# Altium PCB Door locking System PCB.PcbDoc
Units mm, origin at the board's own origin, x right, y up, seen from the top; angles counter-clockwise.
Board outline 152.4 x 101.6 mm, 2 copper layers (Top Layer, Bottom Layer); 23 components, 35 nets, 105 pads, 0 vias.
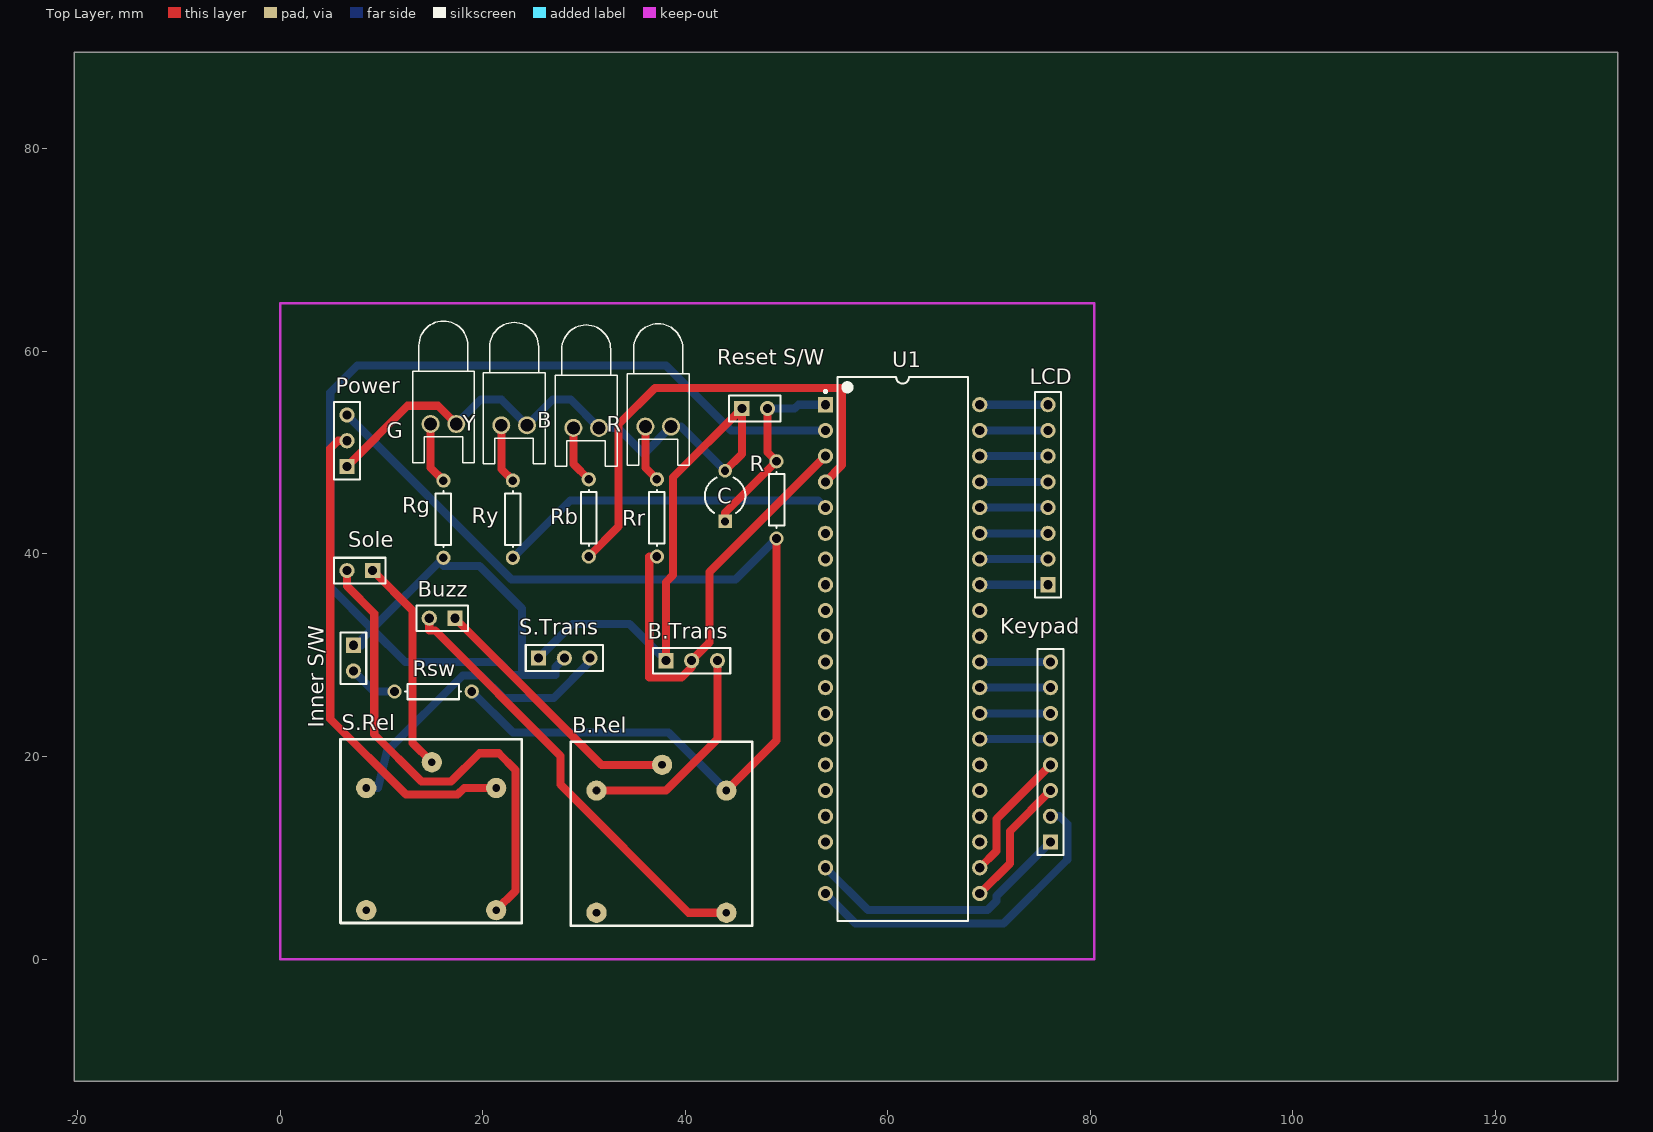
[diagram p0: Top Layer view]
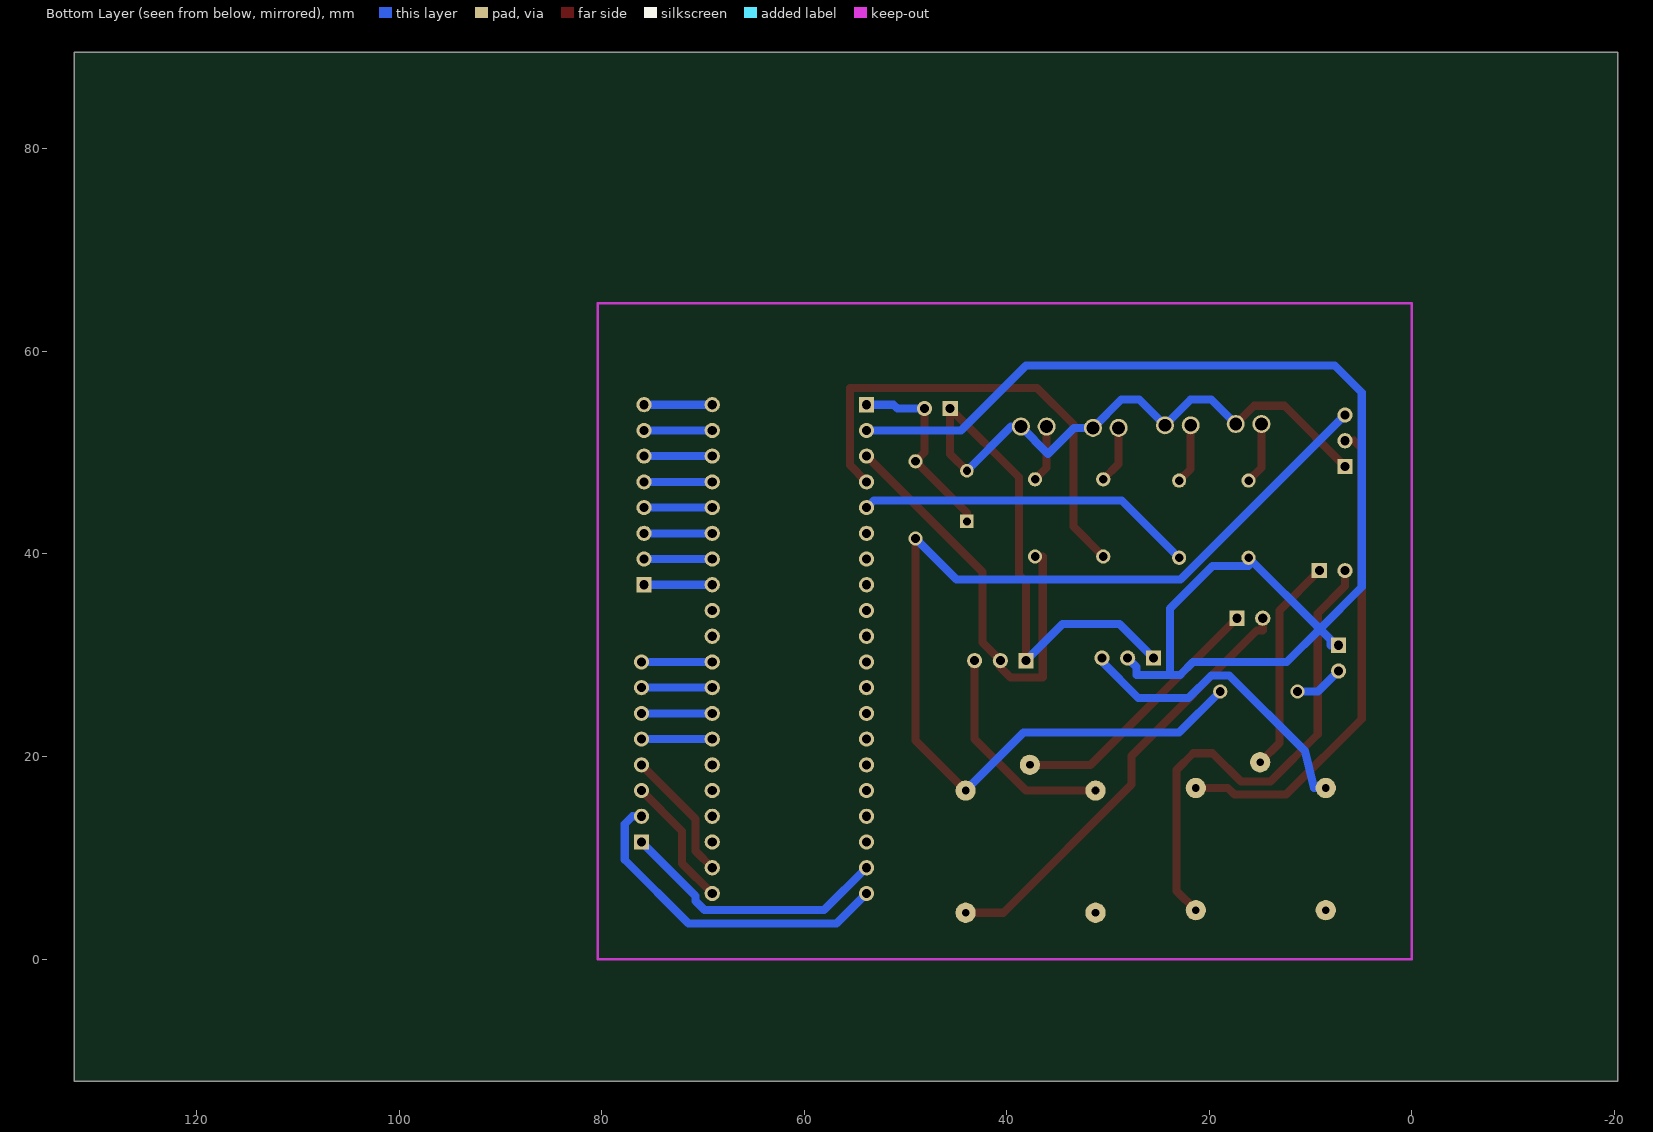
[diagram p1: Bottom Layer view, seen from below]

## Layer stack, top to bottom
Top Layer: signal copper 0.0356
Dielectric: dielectric 0.32, FR-4, Dk 4.8
Bottom Layer: signal copper 0.0356

## Board outline
-20.32,-12.065 132.08,-12.065 132.08,89.535 -20.32,89.535

## Design rules (kind name [scope] priority, off if disabled: settings)
Clearance [All] p1: gap=0.5
PolygonConnect [All] p1: connectstyle=Relief reliefconductorwidth=0.254 reliefentries=4 polygonreliefangle="90 Angle"
RoutingTopology [All] p1: topology=Daisy_Simple
RoutingVias [All] p1: holewidth=0.711 width=1.27 viastyle="Through Hole" minholewidth=0.711 minwidth=1.27 maxholewidth=0.711 maxwidth=1.27
SilkscreenOverComponentPads [All] p1: minsilkscreentomaskgap=0.254
SolderMaskExpansion [All] p1: expansion=0.102
Width [All] p1: maxlimit=0.8 minlimit=0.8 preferedwidth=0.8
26 further rules are at their usual default settings.

## Components (designator, comment, footprint, x,y, rotation, side; value= is the part's Value field where it differs from the comment)
B "Blue" LED-0 30.226,52.451 r180 top
B.Rel "Header 5" relay 37.846,10.922 r0 top
B.Trans "2N3904" HDR1X3 38.1,29.464 r0 top
Buzz "Header 2" HDR1X2 17.272,33.655 r180 top
C "Cap2" CAPR5-4X5 43.942,45.72 r90 top
G "Green" LED-0 16.129,52.832 r180 top
"Inner S/W" "Header 2" HDR1X2 7.239,30.988 r270 top
Keypad "Header 8" HDR1X8 76.073,11.557 r90 top
LCD "Header 8" HDR1X8 75.819,36.957 r90 top
Power "Header 3" HDR1X3 6.604,48.641 r90 top
R "Red" LED-0 37.338,52.578 r180 top
R "Res1" AXIAL-0.3 49.022,45.339 r270 top
Rb "Res1" AXIAL-0.3 30.48,43.561 r270 top
"Reset S/W" "Header 2" HDR1X2 45.593,54.356 r0 top
Rg "Res1" AXIAL-0.3 16.129,43.434 r270 top
Rr "Res1" AXIAL-0.3 37.211,43.561 r270 top
Rsw "Res1" AXIAL-0.3 15.113,26.416 r0 top
Ry "Res1" AXIAL-0.3 22.987,43.434 r270 top
S.Rel "Header 5" relay 15.113,11.176 r0 top
S.Trans "2N3904" HDR1X3 25.527,29.718 r0 top
Sole "Header 2" HDR1X2 9.144,38.354 r180 top
U1 "PIC18F4520-I/P" PDIP600-P40 61.468,30.607 r0 top
Y "Yellow" LED-0 23.114,52.705 r180 top

## Footprints (in the part's own frame and the unit in brackets; to place one, negate y for a bottom-side part, rotate by r counter-clockwise, add the part's x,y. Pads: shape width x height; smd on the part's side, far side on the other; paste and mask are expansions set on the pad)
AXIAL-0.3 [mm] "Axial Device, Thru-Hole; 2 Leads; 0.3 in Pin Spacing"
  round 1.4 hole 0.85: 1(-3.81,0) 2(3.81,0)
  silkscreen extent -2.77,-0.76 2.77,0.76
CAPR5-4X5 [mm] "Capacitor; 2 Leads"
  rect 1.35x1.35 hole 0.8: 1(-2.5,0)
  round 1.35 hole 0.8: 2(2.5,0)
  silkscreen extent -1.69,-2 1.82,2
HDR1X2 [mm] "Connector; Header; 2 Position"
  rect 1.5x1.5 hole 0.9: 1(0,0)
  round 1.5 hole 0.9: 2(2.54,0)
  silkscreen extent -1.27,-1.27 3.81,1.27
HDR1X3 [mm] "Connector; Header; 3 Position"
  rect 1.5x1.5 hole 0.9: 1(0,0)
  round 1.5 hole 0.9: 2(2.54,0) 3(5.08,0)
  silkscreen extent -1.27,-1.27 6.35,1.27
HDR1X8 [mm] "Connector; Header; 8 Position"
  rect 1.5x1.5 hole 0.9: 1(0,0)
  round 1.5 hole 0.9: 2(2.54,0) 3(5.08,0) 4(7.62,0) 5(10.16,0) 6(12.7,0) 7(15.24,0) 8(17.78,0)
  silkscreen extent -1.27,-1.27 19.05,1.27
LED-0 [mil] "LED; 2 Leads"
  round 70 hole 50: 1(50,0) 2(-50,0)
  silkscreen extent -120,-400 120,150
PDIP600-P40 [mm] "DIP, 40-Leads, Row Spacing 15.24mm, Pitch 2.54mm, Body 51.8x13.5mm"
  rect 1.5x1.5 hole 0.9: 1(-7.62,24.13)
  round 1.5 hole 0.9: 2(-7.62,21.59) 3(-7.62,19.05) 4(-7.62,16.51) 5(-7.62,13.97) 6(-7.62,11.43) 7(-7.62,8.89) 8(-7.62,6.35) 9(-7.62,3.81) 10(-7.62,1.27) 11(-7.62,-1.27) 12(-7.62,-3.81) 13(-7.62,-6.35) 14(-7.62,-8.89) 15(-7.62,-11.43) 16(-7.62,-13.97) 17(-7.62,-16.51) 18(-7.62,-19.05) 19(-7.62,-21.59) 20(-7.62,-24.13) 21(7.62,-24.13) 22(7.62,-21.59) 23(7.62,-19.05) 24(7.62,-16.51) 25(7.62,-13.97) 26(7.62,-11.43) 27(7.62,-8.89) 28(7.62,-6.35) 29(7.62,-3.81) 30(7.62,-1.27) 31(7.62,1.27) 32(7.62,3.81) 33(7.62,6.35) 34(7.62,8.89) 35(7.62,11.43) 36(7.62,13.97) 37(7.62,16.51) 38(7.62,19.05) 39(7.62,21.59) 40(7.62,24.13)
  silkscreen extent -7.74,-26.85 6.45,26.85, body extent -7.3,-26.85 7.3,26.85, height 6.35
relay [mm]
  round 2 hole 0.762: 1(-6.604,5.715) 2(6.223,5.715) 3(-6.604,-6.35) 4(6.223,-6.35) 5(-0.127,8.255)
  silkscreen extent -9.14,-7.62 8.76,10.54

## Part data
B: library part LED3, "Typical BLUE SiC LED"
B.Rel S.Rel: "Header, 5-Pin"
B.Trans S.Trans: "NPN General Purpose Amplifier"
Buzz "Inner S/W" "Reset S/W" Sole: "Header, 2-Pin"
C: "Capacitor"
G R Y: library part LED2, "Typical RED, GREEN, YELLOW, AMBER GaAs LED"
Keypad LCD: "Header, 8-Pin"
Power: "Header, 3-Pin"
R Rb Rg Rr Rsw Ry: "Resistor"
U1: "Enhanced Flash Microcontroller with 10-Bit A/D and nanoWatt Technology, 32K Flash, 40-Pin PDIP, Industrial Temperature Range"

## Nets (pads, with @x,y where several pads share a name; then routed paths per layer and width w, separated by ;. In a path a pad name is that pad's centre, name@x,y a point inside that pad or via, vN(x,y) a via of type N, cw(c..) or ccw(c..) an arc to the next point about the centre after c; other vN are vias at no path point)
GND: "Reset S/W.1" B.2 B.Trans.1 C.2 G.2 Power.1 R.2@38.608,52.578 S.Trans.1 Y.2 | length 99.1
  Top Layer w0.8: Power.1 12.598,54.635 15.596,54.635 G.2 ; B.Trans.1 38.1,37.211 38.811,37.922 38.811,47.574 45.593,54.356 45.593,49.871 C.2
  Bottom Layer w0.8: G.2 19.812,55.245 21.844,55.245 Y.2 26.924,55.245 28.702,55.245 B.2 33.35,52.451 35.916,49.886 38.608,52.578 39.584,52.578 C.2 ; S.Trans.1 28.88,33.071 34.493,33.071 B.Trans.1
NetB.Rel_1: B.Rel.1 B.Trans.3 | length 21.8
  Top Layer w0.8: B.Rel.1 38.1,16.637 43.18,21.717 B.Trans.3
NetB.Rel_2: B.Rel.2 Power.3 R.2@49.022,41.529 Rsw.2 | length 107
  Top Layer w0.8: B.Rel.2 49.022,21.59 R.2@49.022,41.529
  Bottom Layer w0.8: Power.3 22.86,37.465 44.958,37.465 R.2@49.022,41.529 ; Rsw.2 22.987,22.352 38.354,22.352 B.Rel.2
NetB.Rel_4: B.Rel.4 Buzz.2 | length 43.8
  Top Layer w0.8: Buzz.2 14.732,32.436 15.316,32.436 27.686,20.066 27.686,17.221 40.335,4.572 B.Rel.4
NetB.Rel_5: B.Rel.5 Buzz.1 | length 26.4
  Top Layer w0.8: Buzz.1 31.75,19.177 B.Rel.5
NetB.Trans_2: B.Trans.2 Rr.2 U1.3 | length 43.6
  Top Layer w0.8: Rr.2 36.449,39.751 36.449,27.813 39.649,27.813 40.64,28.804 B.Trans.2 42.418,31.242 42.418,38.227 U1.3
NetB_1: B.1 Rb.1 | length 5.7
  Top Layer w0.8: B.1 28.956,48.895 Rb.1
NetC_1: "Reset S/W.2" C.1 R.1@49.022,49.149 U1.1 | length 19.5
  Top Layer w0.8: C.1 43.942,44.069 49.022,49.149 48.133,50.038 48.133,54.356
  Bottom Layer w0.8: 48.133,54.356 50.8,54.356 51.181,54.737 U1.1
NetG_1: G.1 Rg.1 | length 6.1
  Top Layer w0.8: G.1 14.859,48.514 Rg.1
"NetInner S/W_1": "Inner S/W.1" Rg.2 S.Trans.2 U1.2 | length 129.4
  Bottom Layer w0.8: 7.239,30.988 8.052,30.988 8.052,31.547 9.091,32.586 ; S.Trans.2 27.178,28.829 27.178,28.067 23.876,28.067 ; U1.2 44.526,52.197 38.1,58.623 7.62,58.623 4.953,55.956 4.953,36.725 9.091,32.586 ; 9.091,32.586 12.362,29.316 21.624,29.316 22.873,28.067 23.876,28.067 ; 9.091,32.586 Rg.2 16.129,38.812 19.675,38.812 23.876,34.61 23.876,28.067
"NetInner S/W_2": "Inner S/W.2" Rsw.1 | length 4.9
  Bottom Layer w0.8: 7.239,28.448 9.271,26.416 Rsw.1
NetKeypad_1: Keypad.1 U1.19 | length 27
  Bottom Layer w0.8: U1.19 58.039,4.826 69.85,4.826 70.739,5.715 70.739,6.223 Keypad.1
NetKeypad_2: Keypad.2 U1.20 | length 33.2
  Bottom Layer w0.8: U1.20 56.82,3.505 71.425,3.505 77.724,9.804 77.724,13.335 76.962,14.097 Keypad.2
NetKeypad_3: Keypad.3 U1.21 | length 13.1
  Top Layer w0.8: U1.21 72.06,9.449 72.06,12.624 Keypad.3
NetKeypad_4: Keypad.4 U1.22 | length 13.1
  Top Layer w0.8: U1.22 70.739,10.668 70.739,13.843 Keypad.4
NetKeypad_5: Keypad.5 U1.27 | length 7
  Bottom Layer w0.8: U1.27 Keypad.5
NetKeypad_6: Keypad.6 U1.28 | length 7
  Bottom Layer w0.8: U1.28 Keypad.6
NetKeypad_7: Keypad.7 U1.29 | length 7
  Bottom Layer w0.8: U1.29 Keypad.7
NetKeypad_8: Keypad.8 U1.30 | length 7
  Bottom Layer w0.8: U1.30 Keypad.8
NetLCD_1: LCD.1 U1.33 | length 6.7
  Bottom Layer w0.8: U1.33 LCD.1
NetLCD_2: LCD.2 U1.34 | length 6.7
  Bottom Layer w0.8: U1.34 LCD.2
NetLCD_3: LCD.3 U1.35 | length 6.7
  Bottom Layer w0.8: U1.35 LCD.3
NetLCD_4: LCD.4 U1.36 | length 6.7
  Bottom Layer w0.8: U1.36 LCD.4
NetLCD_5: LCD.5 U1.37 | length 6.7
  Bottom Layer w0.8: U1.37 LCD.5
NetLCD_6: LCD.6 U1.38 | length 6.7
  Bottom Layer w0.8: U1.38 LCD.6
NetLCD_7: LCD.7 U1.39 | length 6.7
  Bottom Layer w0.8: U1.39 LCD.7
NetLCD_8: LCD.8 U1.40 | length 6.7
  Bottom Layer w0.8: U1.40 LCD.8
NetPower_2: Power.2 S.Rel.2 | length 48.4
  Top Layer w0.8: Power.2 5.715,51.181 4.953,50.419 4.953,23.701 12.423,16.231 17.526,16.231 18.186,16.891 S.Rel.2
NetR_1: R.1@36.068,52.578 Rr.1 | length 5.7
  Top Layer w0.8: R.1@36.068,52.578 36.068,48.514 Rr.1
NetRb_2: Rb.2 U1.4 | length 47.8
  Top Layer w0.8: Rb.2 33.426,42.697 33.426,52.807 37.008,56.388 55.499,56.388 55.499,48.768 U1.4
NetRy_1: Ry.1 Y.1 | length 5.9
  Top Layer w0.8: Y.1 21.844,48.387 Ry.1
NetRy_2: Ry.2 U1.5 | length 33.5
  Bottom Layer w0.8: Ry.2 28.651,45.288 53.137,45.288 U1.5
NetS.Rel_1: S.Rel.1 S.Trans.3 | length 30.8
  Bottom Layer w0.8: S.Rel.1 9.677,16.891 10.566,20.548 18.034,28.016 19.812,28.016 22.047,25.781 27.026,25.781 30.607,29.362 S.Trans.3
NetS.Rel_4: S.Rel.4 Sole.2 | length 49.6
  Top Layer w0.8: Sole.2 6.604,36.83 9.296,34.138 9.296,22.2 13.965,17.531 16.891,17.531 19.68,20.32 21.59,20.32 23.241,18.669 23.241,6.731 S.Rel.4
NetS.Rel_5: S.Rel.5 Sole.1 | length 21.3
  Top Layer w0.8: Sole.1 13.081,34.417 13.081,21.336 S.Rel.5
pads on no net: B.Rel.3 S.Rel.3 U1.6 U1.7 U1.8 U1.9 U1.10 U1.11 U1.12 U1.13 U1.14 U1.15 U1.16 U1.17 U1.18 U1.23 U1.24 U1.25 U1.26 U1.31 U1.32

## Keep-outs
Keep-Out Layer:
  lines w0.254: 0,0 0,64.77 80.391,64.77 80.391,0 0,0